# Altium PCB Power Converter 5V as TO-3 replacement.PcbDoc
Units mm, origin at the board's own origin, x right, y up, seen from the top; angles counter-clockwise.
Board outline 25.92 x 38.93 mm, 2 copper layers (Top Layer, Bottom Layer), stack 0.969 mm thick; 19 components, 10 nets, 41 pads, 35 vias.
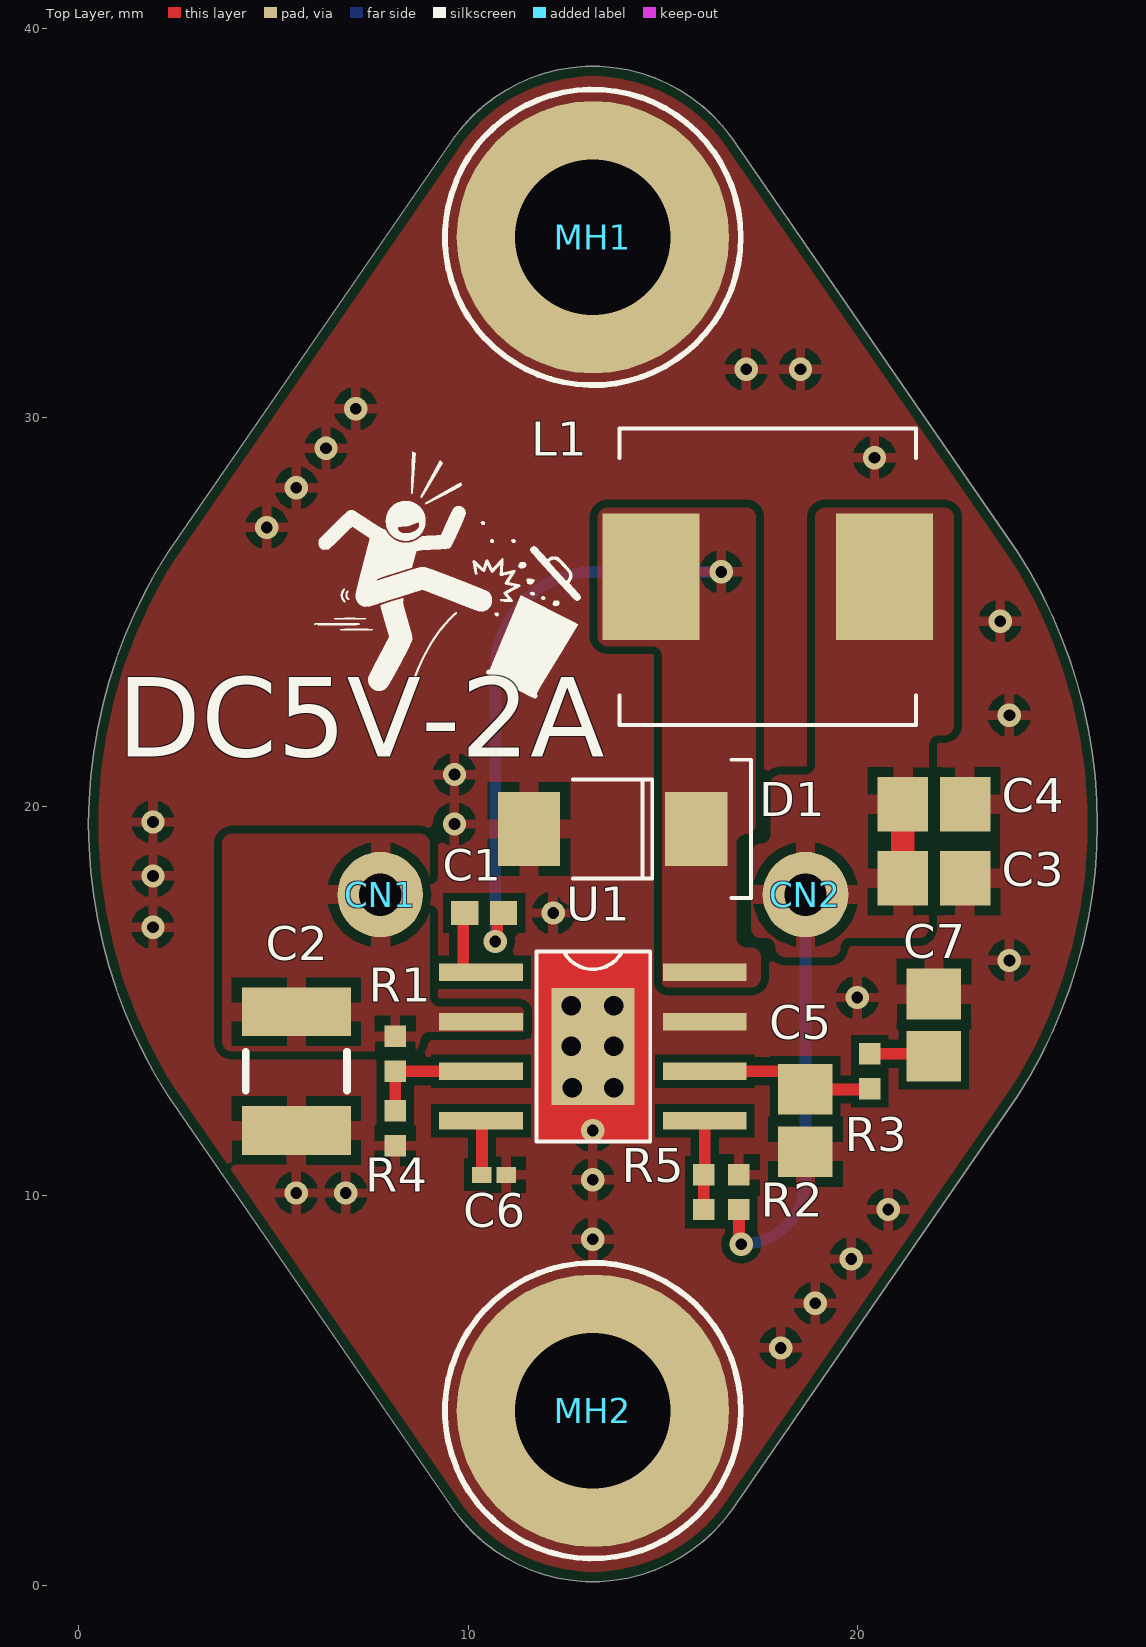
[diagram p0: Top Layer view]
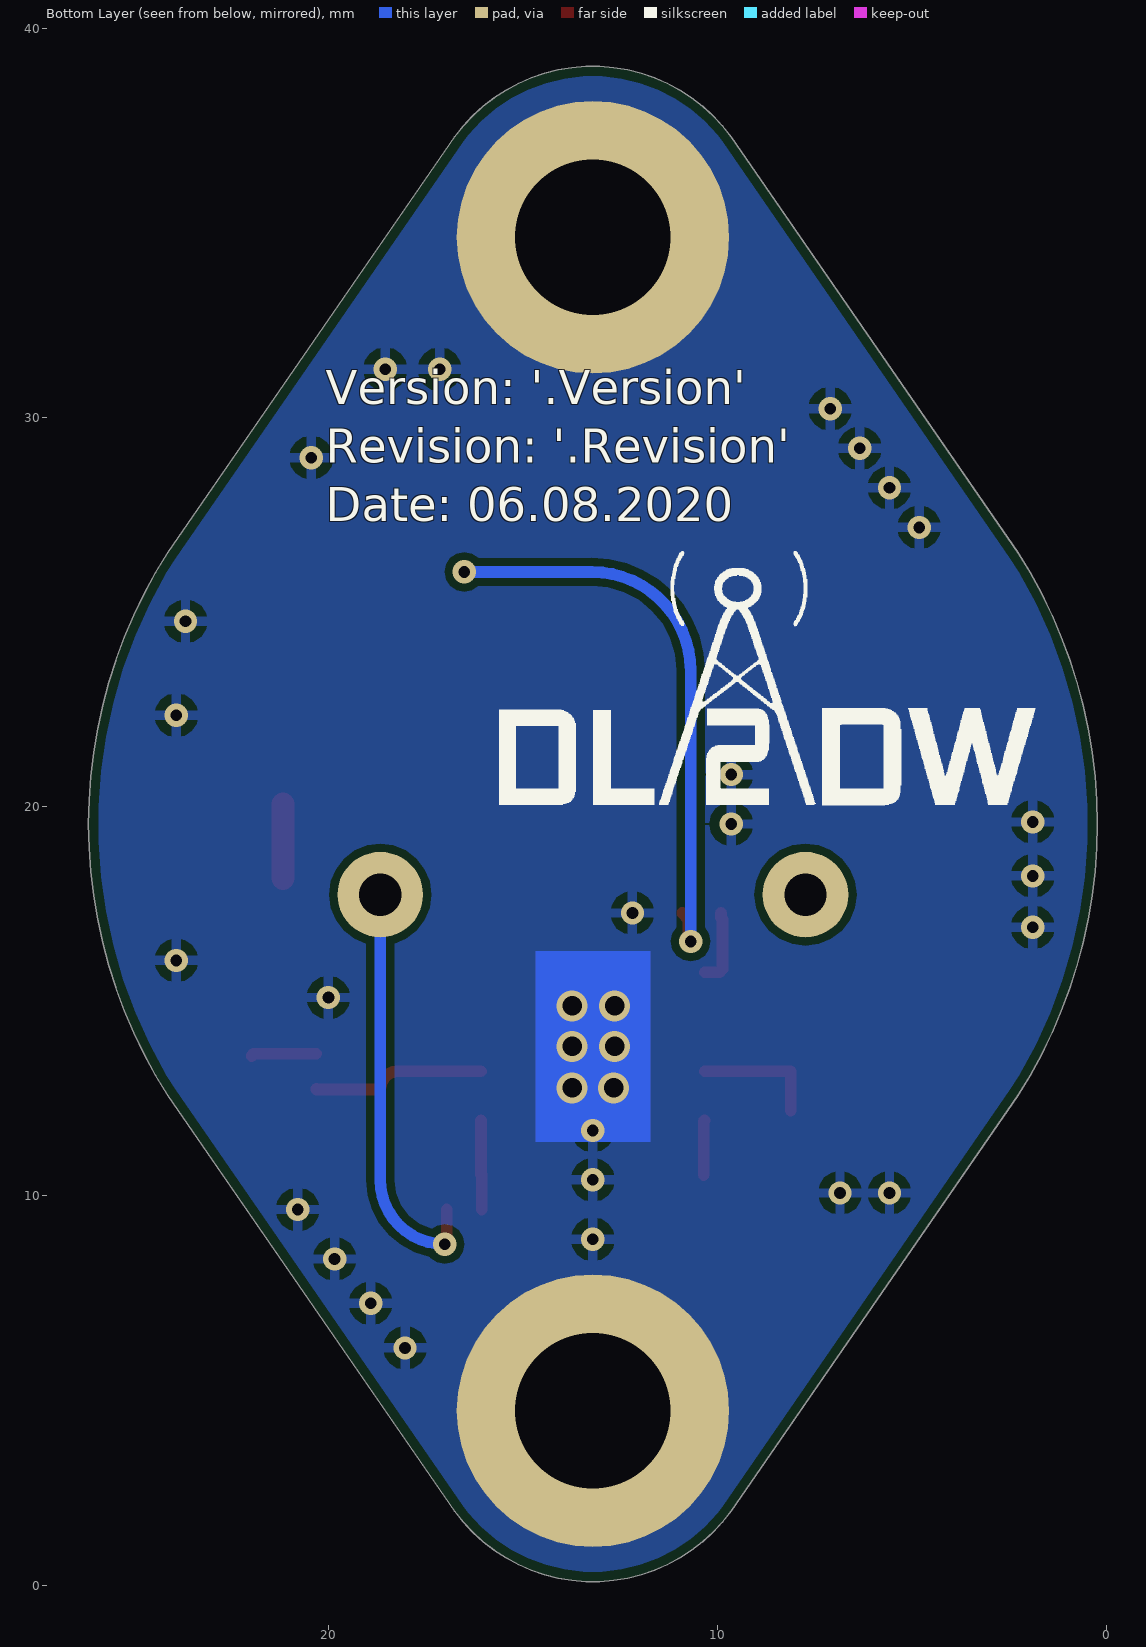
[diagram p1: Bottom Layer view, seen from below]
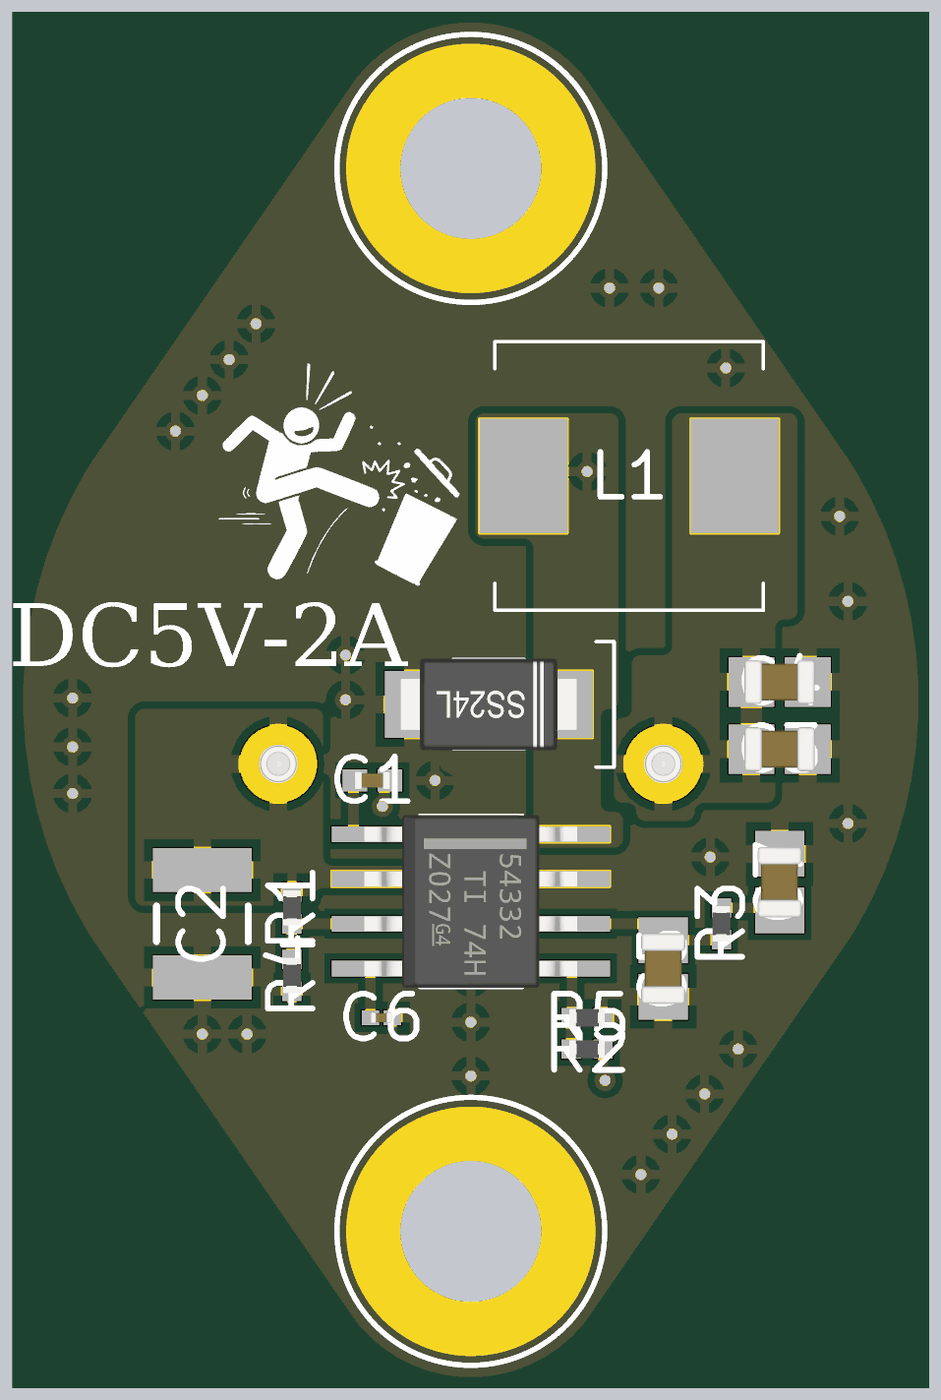
[diagram p2: 3D render of the assembled board from above, using the file's embedded part models]

## Layer stack, top to bottom
Top Solder: solder mask 0.0254, SM-001, Dk 4
Top Layer: signal copper 0.035
Dielectric 1: core 0.8986, Core-043, Dk 4.3
Bottom Layer: signal copper 0.035
Bottom Solder: solder mask 0.0254, SM-001, Dk 4

## Board outline
2.29,12.576 cw(c13.208,19.558) 2.29,26.54 9.652,37.211 cw(c13.208,34.633) 16.764,37.211 24.126,26.54 cw(c13.208,19.558) 24.126,12.576 16.764,1.905 cw(c13.208,4.483) 9.652,1.905

## Design rules (kind name [scope] priority, off if disabled: settings)
BoardOutlineClearance [All] p1: gap=0.254 ignorepadtopadclearanceinfootprint=FALSE
Clearance [All] p1: gap=0.2 ignorepadtopadclearanceinfootprint=TRUE
ComponentClearance ComponentClearance_Sheet [HasFootprint('PCB Title Block DIN A4')] p1: gap=0 collisioncheckmode=3 verticalgap=0 showdistances=FALSE
ComponentClearance [All] p2: gap=0.254 collisioncheckmode=3 verticalgap=0.254 showdistances=FALSE
HoleSize [All] p1: absolutevalues=TRUE maxlimit=10 minlimit=0.025 maxpercent=80.000 minpercent=20.000
MinimumSolderMaskSliver [All] p1: minsoldermaskwidth=0.103
PolygonConnect [All] p1: connectstyle=Relief reliefconductorwidth=0.254 reliefentries=4 polygonreliefangle="90 Angle" airgapwidth=0.254
RoutingVias [All] p1: holewidth=0.4 width=0.7 viastyle="Through Hole" minholewidth=0.3 minwidth=0.6 maxholewidth=0.5 maxwidth=0.8
SilkToSilkClearance [All] p1: silktosilkclearance=0
SilkToSolderMaskClearance [IsPad] p1: minsilkscreentomaskgap=0.2 clearancetoexposedcopper=TRUE
SolderMaskExpansion [All] p1: expansion=0.038 istentingtop=FALSE
UnRoutedNet [All] p1: checkbadconnections=TRUE
Width [All] p1: maxlimit=0.6 minlimit=0.3 preferedwidth=0.4
24 further rules are at their usual default settings.

## Components (designator, comment, footprint, x,y, rotation, side; value= is the part's Value field where it differs from the comment)
C1 "100nF / 10V" "CAP CER SMD 0402 100nF 10V Murata GRM155R71A104KA01D" 10.414,17.272 r0 top
C2 "22µF / 16V" "CAP CER SMD 1210 22µF 16V Murata GRM32ER61C226ME20L" 5.588,13.208 r90 top
C3 "22µF / 10V" "CAP CER SMD 0805 22µF 10V Murata GRM21BR61A226ME44L" 21.971,18.161 r180 top
C4 "22µF / 10V" "CAP CER SMD 0805 22µF 10V Murata GRM21BR61A226ME44L" 21.971,20.066 r180 top
C5 "10pF / 50V" "CAP CER SMD 0805 10pF 50V Samsung CL21C100JBANNNC" 18.669,11.938 r90 top
C6 "8,2nF / 10V" "CAP CER SMD 0201 8,2nF 10V Murata GRM033R71A822KA01D" 10.668,10.541 r180 top
C7 "1.2nF / 50V" "CAP CER SMD 0805 1.2nF 50V Samsung CL21C122JBFNNNE" 21.971,14.389 r270 top
CN1 "Input 9V" "Printed Circuit Pin 1.02mm 3125-2-00-80-00-00-08-0" 7.745,17.743 r90 top locked
CN2 "+5V" "Printed Circuit Pin 1.02mm 3125-2-00-80-00-00-08-0" 18.671,17.743 r90 top locked
D1 "SS24FL" SS24FL 13.716,19.431 r180 top
L1 "DR73-4R7-R" "Inductor SMD 4.7µH Eatont DR73-4R7-R" 17.701,25.908 r0 top
MH1 "Mounting Hole 4.0mm with Pad" "Mounting Hole 4mm with Pad" 13.208,34.633 r90 top
MH2 "Mounting Hole 4.0mm with Pad" "Mounting Hole 4mm with Pad" 13.208,4.483 r90 top
R1 "169k" "RES SMD 0402 169k Vishay CRCW0402169KFKED" 8.128,13.658 r90 top
R2 "10k2" "RES SMD 0402 10k2 Vishay CRCW040210K2FKED" 16.51,9.652 r0 top
R3 "33k2" "RES SMD 0402 33k2 Vishay CRCW040233K2FKED" 20.32,13.208 r270 top
R4 "40k2" "RES SMD 0402 40k2 Vishay CRCW040240K2FKED" 8.128,11.742 r90 top
R5 "1k96" "RES SMD 0402 1k96 Vishay CRCW04021K96FKED" 16.51,10.541 r180 top
U1 "TPS54332DDAR" "DC-DC Converter (Buck) TPS54332DDAR SO-Power Pad" 13.208,13.843 r270 top

## Footprints (in the part's own frame and the unit in brackets; to place one, negate y for a bottom-side part, rotate by r counter-clockwise, add the part's x,y. Pads: shape width x height; smd on the part's side, far side on the other; paste and mask are expansions set on the pad)
"CAP CER SMD 0201 8,2nF 10V Murata GRM033R71A822KA01D" [mm] "Chip Capacitor, 2-Leads, Body 0,60x0,30mm, IPC Medium Density"
  rect 0.5x0.42 smd: 1(-0.31,0) 2(0.31,0)
  body extent -0.3,-0.15 0.3,0.15, height 0.3
"CAP CER SMD 0402 100nF 10V Murata GRM155R71A104KA01D" [mm] "Chip Capacitor, 2-Leads, Body 1,00x0,50mm, IPC Medium Density"
  rect 0.7x0.62 smd: 1(-0.5,0) 2(0.5,0)
  body extent -0.5,-0.25 0.5,0.25, height 0.5
"CAP CER SMD 0805 1.2nF 50V Samsung CL21C122JBFNNNE" [mm] "Chip Capacitor, 2-Leads, Body 2,00x1,25mm, IPC Medium Density"
  rect 1.3x1.4 smd: 1(-0.8,0) 2(0.8,0)
  body extent -1,-0.62 1,0.62, height 1.25
"CAP CER SMD 0805 10pF 50V Samsung CL21C100JBANNNC" [mm] "Chip Capacitor, 2-Leads, Body 2,00x1,25mm, IPC Medium Density"
  rect 1.3x1.4 smd: 1(-0.8,0) 2(0.8,0)
  body extent -1,-0.62 1,0.62, height 1.25
"CAP CER SMD 0805 22µF 10V Murata GRM21BR61A226ME44L" [mm] "Chip Capacitor, 2-Leads, Body 2,00x1,25mm, IPC Medium Density"
  rect 1.3x1.4 smd: 1(-0.8,0) 2(0.8,0)
  body extent -1,-0.63 1,0.62, height 1.25
"CAP CER SMD 1210 22µF 16V Murata GRM32ER61C226ME20L" [mm] "Chip Capacitor, 2-Leads, Body 3,20x2,50mm, IPC Medium Density"
  rect 1.25x2.8 smd: 1(-1.525,0) 2(1.525,0)
  silkscreen extent -0.5,-1.3 0.5,1.3, body extent -1.6,-1.25 1.6,1.25, height 2.5
"DC-DC Converter (Buck) TPS54332DDAR SO-Power Pad" [mm]
  rect 0.45x2.15 smd: 1(-1.905,-2.875) 2(-0.635,-2.875) 3(0.635,-2.875) 4(1.905,-2.875) 5(1.905,2.875) 6(0.635,2.875) 7(-0.635,2.875) 8(-1.905,2.875)
  rect 3x2.13 smd: 9(0,0)
  Top Layer region: -2.445,1.47 2.445,1.47 2.445,-1.47 -2.445,-1.47
  Bottom Layer region: -2.445,1.47 2.445,1.47 2.445,-1.47 -2.445,-1.47
  silkscreen extent -2.44,-1.45 2.44,1.47, body extent -2.45,-3.02 2.45,3.02, height 1.7
"Inductor SMD 4.7µH Eatont DR73-4R7-R" [mm] "4,7µH Geschirmt Drahtgewickelt Induktor 3,09A 29,7mOhm Nicht standardmäßig"
  rect 2.5x3.25 smd: 1(-3,0) 2(3,0)
  silkscreen extent -3.81,-3.81 3.81,3.81, body extent -3.8,-3.8 3.8,3.8, height 3.56
"Mounting Hole 4mm with Pad" [mm]
  round 7 hole 4: 1(0,0)
  silkscreen extent -3.8,-3.8 3.8,3.8
"Printed Circuit Pin 1.02mm 3125-2-00-80-00-00-08-0" [mm]
  round 2.2 hole 1.09: 1(0,0)
  body extent -0.9,-0.9 0.9,0.9, height 0.48
"RES SMD 0402 1k96 Vishay CRCW04021K96FKED" [mm] "Chip Resistor, 2-Leads, Body 1,00x0,50mm, IPC Medium Density"
  rect 0.55x0.55 smd: 1(-0.45,0) 2(0.45,0)
  body extent -0.5,-0.25 0.5,0.25, height 0.35
"RES SMD 0402 10k2 Vishay CRCW040210K2FKED" [mm] "Chip Resistor, 2-Leads, Body 1,00x0,50mm, IPC Medium Density"
  rect 0.55x0.55 smd: 1(-0.45,0) 2(0.45,0)
  body extent -0.5,-0.25 0.5,0.25, height 0.35
"RES SMD 0402 33k2 Vishay CRCW040233K2FKED" [mm] "Chip Resistor, 2-Leads, Body 1,00x0,50mm, IPC Medium Density"
  rect 0.55x0.55 smd: 1(-0.45,0) 2(0.45,0)
  body extent -0.5,-0.25 0.5,0.25, height 0.35
"RES SMD 0402 40k2 Vishay CRCW040240K2FKED" [mm] "Chip Resistor, 2-Leads, Body 1,00x0,50mm, IPC Medium Density"
  rect 0.55x0.55 smd: 1(-0.45,0) 2(0.45,0)
  body extent -0.5,-0.25 0.5,0.25, height 0.35
"RES SMD 0402 169k Vishay CRCW0402169KFKED" [mm] "Chip Resistor, 2-Leads, Body 1,00x0,50mm, IPC Medium Density"
  rect 0.55x0.55 smd: 1(-0.45,0) 2(0.45,0)
  body extent -0.5,-0.25 0.5,0.25, height 0.35
SS24FL [mm] "Schottky Dioden & Gleichrichter 40V, 2A SCHOTTKY"
  rect 1.6x1.9 smd: 1(-2.15,0) 2(2.15,0)
  silkscreen extent -3.56,-1.78 1.02,1.78, body extent -2.5,-1.3 2.5,1.3, height 1.15

## Part data
C1: library part CMP-Capacitors-Ceramic_Capacitors-00034-2, "CAP CER 0.1UF 10V X7R 0402", Capacitance=100nF, Case Code (Imperial)=0402, Case Code (Metric)=1005, Dielectric=X7R, Max Operating Temperature=125°C, Min Operating Temperature=-55°C, Package Quantity=1, Tolerance=10%, Voltage=10V, Case/Package=0402, Depth=0.5mm, Dissipation Factor=0.035%, Height=0.5mm, Lead Free="Lead Free", Length=1mm, Mount="Surface Mount", Number of Pins=2, Packaging="Tape and Reel", Radiation Hardening=No, REACH SVHC="No SVHC", Termination=SMD/SMT, Thickness=0.022inch, Voltage Rating=10V, Voltage Rating (DC)=10V, Width=0.02inch
C2: library part CMP-Capacitors-Ceramic_Capacitors-00036-1, "Ceramic capacitor SMD 1210 22 µF 16 V 20 %", Capacitance=22uF, Case Code (Imperial)=1210, Case Code (Metric)=3225, Dielectric=X5R, Max Operating Temperature=85°C, Min Operating Temperature=-55°C, Package Quantity=1000, Tolerance=20%, Voltage=16V, Case/Package=1210, Depth=2.5mm, Height=2.5mm, Lead Free="Lead Free", Length=3.2mm, Material=Ceramic, Mount="Surface Mount", Packaging="Tape and Reel", Radiation Hardening=No, Termination=SMD/SMT, Thickness=0.106inch, Voltage Rating=16V, Voltage Rating (DC)=16V, Width=0.098inch
C3 C4: library part CMP-Capacitors-Ceramic_Capacitors-00038-1, "Multilayer Ceramic Capacitors MLCC - SMD/SMT 0805 22uF 10volts X5R 20%", Capacitance=22uF, Case Code (Imperial)=0805, Case Code (Metric)=2012, Dielectric=X5R, Dielectric Material=Ceramic, Max Operating Temperature=85°C, Min Operating Temperature=-55°C, Package Quantity=3000, Tolerance=20%, Voltage=10V, Case/Package=0805, Composition=Ceramic, Depth=1.25mm, Dissipation Factor=0.035%, Height=1.25mm, Lead Free="Lead Free", Length=2mm, Mount="Surface Mount", Packaging="Tape and Reel", Termination=SMD/SMT, Thickness=0.057inch, Voltage Rating=10V, Voltage Rating (DC)=10V, Weight=0.000335oz, Width=1.25mm
C5: library part CMP-Capacitors-Ceramic_Capacitors-00031-1, "Cap Ceramic 10pF 50VDC C0G 5% SMD 0805 Paper T/R", Capacitance=10pF, Case Code (Imperial)=0805, Case Code (Metric)=2012, Dielectric=C0G, Max Operating Temperature=125°C, Min Operating Temperature=-55°C, Package Quantity=1, Tolerance=5%, Voltage Rating=50V, Case/Package=0805, Contact Plating=Tin, Depth=1.25mm, Height=0.65mm, Length=2mm, Mount="Surface Mount", Packaging="Tape and Reel", Radiation Hardening=No, Thickness=0.03inch, Width=0.049inch
C6: library part CMP-Capacitors-Ceramic_Capacitors-00033-1, "Multilayer Ceramic Capacitors MLCC - SMD/SMT 0.0082uF 10volts 10%", Capacitance=8.2nF, Case Code (Imperial)=0201, Case Code (Metric)=0603, Dielectric=X7R, Max Operating Temperature=125°C, Min Operating Temperature=-55°C, Package Quantity=15000, Tolerance=10%, Voltage Rating=10V, Case/Package=0201, Depth=0.3mm, Height=0.3mm, Length=0.6mm, Mount="Surface Mount", Packaging="Tape and Reel", Radiation Hardening=No, Termination=SMD/SMT, Thickness=0.013inch, Voltage Rating (DC)=10V, Width=0.012inch
C7: library part CMP-Capacitors-Ceramic_Capacitors-00037-1, "Ceramic capacitor SMD-0805 1.2nF /50V NP0# J +-5% SAMSUNG , RoHS", Capacitance=1.2nF, Case Code (Imperial)=0805, Case Code (Metric)=2012, Max Operating Temperature=125°C, Min Operating Temperature=-55°C, Package Quantity=1, Tolerance=5%, Voltage Rating=50V, Case/Package=0805, Lead Free="Lead Free", Length=0.079inch, Mount="Surface Mount", Packaging="Cut Tape", Thickness=0.053inch, Voltage Rating (DC)=50V, Width=0.049inch
CN1 CN2: library part CMP-Mechanicals-00020-1, "CONN PC PIN CIRC 0.040DIA TIN", Package Quantity=500, Board Thickness=0.062inch, Contact Material=Brass, Contact Plating=Tin, Flange Diameter=0.071inch, Gender=Male, Hole Diameter=1.09mm, Insulation=Non-Insulated, Length=0.402inch, Material=Brass, Mount="Through Hole", Mounting Hole Diameter=0.043inch, Outside Diameter=1.8mm, Packaging=Bulk, Plating=Tin, Termination="PC Pin"
D1: library part CMP-Diodes-00012-3, "40V, 2A SCHOTTKY IN SOD123F", Average Rectified Current=2A, Case/Package=SOD, Max Forward Surge Current (Ifsm)=50A, Max Repetitive Reverse Voltage (Vrrm)=40V, Element Configuration=Single, Max Reverse Voltage (DC)=40V, Mount="Surface Mount", Number of Pins=2, Packaging="Tape and Reel", Reverse Recovery Time=9.495ns, Weight=0.0276g
L1: library part CMP-Inductors-00014-2, "Ind Power Shielded Wirewound 4.7uH 20% 100KHz Ferrite 3.09A T/R", Case/Package=Nonstandard, Current Rating=3.09A, DC Resistance (DCR)=29.7mR, Inductance=4.7uH, Inductance Tolerance=20%, Max Operating Temperature=125°C, Min Operating Temperature=-40°C, Package Quantity=1350, Saturation Current=3.78A, Self Resonant Frequency=100kHz, Composition=Wirewound, Core Material=Ferrite, Depth=7.6mm, Height=3.55mm, Height - Seated (Max)=0.139inch, Lead Free="Lead Free", Length=7.6mm, Max DC Current=3.09A, Military Standard=Not, Mount="Surface Mount", Number of Pins=2, Packaging="Tape and Reel", Radiation Hardening=No, REACH SVHC="No SVHC", RMS Current (Irms)=3.09A, Shielding=Shielded, Termination=SMD/SMT, Test Frequency=100kHz, Tolerance=20%, Weight=0.032oz, Width=6mm
MH1 MH2: library part CMP-Mechanicals-00019-2
R1: library part CMP-Resistors-00008-1, "VISHAY - CRCW0402169KFKED - RES, THICK FILM, 169K, 1%, 0.063W, 0402, REEL", Case Code (Imperial)=0402, Case Code (Metric)=1005, Max Operating Temperature=155°C, Max Power Dissipation=63mW, Min Operating Temperature=-55°C, Package Quantity=10, Resistance=169kR, Temperature Coefficient=100ppm/°C, Tolerance=1%, Voltage Rating=50V, Case/Package=0402, Composition="Thick Film", Contact Plating=Tin, Depth=0.5mm, Features="Automotive AEC-Q200", Height=0.35mm, Lead Free="Lead Free", Length=1mm, Military Standard=Not, Mount="Surface Mount", Number of Pins=2, Number of Terminations=2, Packaging="Tape and Reel", Power Rating=63mW, Radiation Hardening=No, REACH SVHC=Unknown, Termination=SMD/SMT, Voltage Rating (DC)=50V, Weight=2.3E-05oz, Width=0.02inch
R2: library part CMP-Resistors-00024-1, "VISHAY         CRCW040210K2FKED.            Surface Mount Chip Resistor, Thick Film, AEC-Q200 CRCW Series, 10.2 kohm, 63 mW,  1%, 50 V", Case Code (Imperial)=0402, Case Code (Metric)=1005, Max Operating Temperature=155°C, Max Power Dissipation=63mW, Min Operating Temperature=-55°C, Package Quantity=10, Resistance=10.2kR, Temperature Coefficient=100ppm/°C, Tolerance=1%, Voltage Rating=50V, Case/Package=0402, Composition="Thick Film", Contact Plating=Tin, Depth=0.5mm, Features="Automotive AEC-Q200", Height=0.35mm, Length=1mm, Military Standard=Not, Mount="Surface Mount", Number of Pins=2, Number of Terminations=2, Packaging="Tape and Reel", Power Rating=63mW, Radiation Hardening=No, REACH SVHC=Unknown, Termination=SMD/SMT, Weight=2.3E-05oz, Width=0.5mm
R3: library part CMP-Resistors-00037-1, "Res Thick Film 0402 33.2K Ohm 1% 1/16W 100ppm/C Molded SMD Paper T/R", Case Code (Imperial)=0402, Case Code (Metric)=1005, Max Operating Temperature=155°C, Max Power Dissipation=63mW, Min Operating Temperature=-55°C, Package Quantity=10, Resistance=33.2kR, Temperature Coefficient=100ppm/°C, Tolerance=1%, Voltage Rating=50V, Case/Package=0402, Composition="Thick Film", Contact Plating=Tin, Depth=0.5mm, Features="Automotive AEC-Q200", Height=0.35mm, Lead Free="Lead Free", Length=1mm, Military Standard=Not, Mount="Surface Mount", Number of Pins=2, Number of Terminations=2, Packaging="Tape and Reel", Power Rating=63mW, Radiation Hardening=No, REACH SVHC=Unknown, Termination=SMD/SMT, Voltage Rating (DC)=50V, Weight=2.3E-05oz, Width=0.5mm
R4: library part CMP-Resistors-00036-1, "Res Thick Film 0402 40.2K Ohm 1% 1/16W 100ppm/C Molded SMD SMD Paper T/R", Case Code (Imperial)=0402, Case Code (Metric)=1005, Max Operating Temperature=155°C, Max Power Dissipation=63mW, Min Operating Temperature=-55°C, Package Quantity=10, Resistance=40.2kR, Temperature Coefficient=100ppm/°C, Tolerance=1%, Voltage Rating=50V, Case/Package=0402, Composition="Thick Film", Contact Plating=Tin, Depth=0.5mm, Features="Automotive AEC-Q200", Height=0.35mm, Lead Free="Lead Free", Length=1mm, Military Standard=Not, Number of Terminations=2, Packaging="Tape and Reel", Power Rating=63mW, Radiation Hardening=No, REACH SVHC=Unknown, Termination=SMD/SMT, Voltage Rating (DC)=50V, Weight=2.3E-05oz, Width=0.5mm
R5: library part CMP-Resistors-00038-1, "VISHAY         CRCW04021K96FKED             RES, THICK FILM, 1K96, 1%, 0.063W, 0402", Case Code (Imperial)=0402, Case Code (Metric)=1005, Max Operating Temperature=155°C, Max Power Dissipation=63mW, Min Operating Temperature=-55°C, Package Quantity=10, Resistance=1.96kR, Temperature Coefficient=100ppm/°C, Tolerance=1%, Voltage Rating=50V, Case/Package=0402, Composition="Thick Film", Contact Plating=Tin, Depth=0.5mm, Features="Automotive AEC-Q200", Height=0.35mm, Length=1mm, Military Standard=Not, Number of Pins=2, Number of Terminations=2, Packaging="Tape and Reel", Power Rating=63mW, Radiation Hardening=No, REACH SVHC=Unknown, Termination=SMD/SMT, Weight=2.3E-05oz, Width=0.5mm
U1: library part CMP-ICs-Power_Supply-00013-5, "TEXAS INSTRUMENTS - TPS54332DDAR - DC/DC CONV, BUCK, 1MHZ, SOIC-8", Max Input Voltage=28V, Max Operating Temperature=150°C, Max Output Current=3.5A, Max Output Voltage=26.04V, Min Input Voltage=3.5V, Min Operating Temperature=-40°C, Min Output Voltage=800mV, Output Voltage=25V, Package Quantity=2500, Quiescent Current=82uA, Switching Frequency=1MHz, Contact Plating=Gold, Height=1.55mm, Lead Free="Contains Lead", Length=5mm, Min Supply Voltage=3.5V, Mount="Surface Mount", Number of Outputs=1, Number of Pins=8, Operating Supply Voltage=28V, Output Configuration=Positive, Output Current=3.5A, Output Type=Adjustable, Packaging="Tape and Reel", Radiation Hardening=No, REACH SVHC="No SVHC", Synchronous Rectifier=No, Weight=0.00249oz, Width=4mm

## Via types
v1: diameter 0.6, hole 0.3, Top Layer to Bottom Layer, tented both sides, 29 vias
v2: diameter 0.8, hole 0.5, Top Layer to Bottom Layer, tented both sides, 4 vias
v3: diameter 0.8, hole 0.5, Top Layer to Bottom Layer, tented bottom, 2 vias

## Nets (pads, with @x,y where several pads share a name; then routed paths per layer and width w, separated by ;. In a path a pad name is that pad's centre, name@x,y a point inside that pad or via, vN(x,y) a via of type N, cw(c..) or ccw(c..) an arc to the next point about the centre after c; other vN are vias at no path point)
5V-GND: C2.1 C3.1 C4.1 C5.1 C6.1 C7.1 D1.2 MH1.1 MH2.1 R4.1 R5.1 U1.7 U1.9
  other v1: 18.034,6.096 18.919,7.24 19.845,8.382 13.208,8.89 20.795,9.652 5.588,10.077 6.858,10.077 13.208,10.414 13.208,11.684 20.003,15.099 23.91,16.053 1.905,16.904 12.192,17.272 1.905,18.223 9.652,19.558 1.905,19.611 9.652,20.828 23.91,22.352 23.675,24.765 4.826,27.178 5.588,28.194 20.445,28.971 6.35,29.21 7.112,30.226 17.145,31.242 18.542,31.242
  other v2: 12.675,12.776 13.741,12.776 12.649,14.884 13.741,14.884
  other v3: 12.649,13.843 13.741,13.843
+5V: C3.2 C4.2 CN2.1 L1.2 R2.2 | length 12.8
  Top Layer w0.3: R2.2 16.96,8.821 ccw(c17.018,8.821) v1(17.018,8.763)
  Top Layer w0.6: C3.2 C4.2
  Bottom Layer w0.3: v1(17.018,8.763) ccw(c17.018,10.416) 18.671,10.416 CN2.1
Boot-5V: C1.1 U1.1 | length 2
  Top Layer w0.3: C1.1 9.914,17.149 9.877,17.112 9.877,15.823 9.952,15.748 U1.1
Comp-5V: C5.2 R3.2 U1.6 | length 4.5
  Top Layer w0.3: U1.6 18.199,13.208 cw(c18.199,12.738) C5.2 20.3,12.738 ccw(c20.3,12.758) R3.2
EN-5V: R1.1 R4.2 U1.3 | length 3.2
  Top Layer w0.3: R4.2 R1.1 U1.3
NetC7_2: C7.2 R3.1 | length 1.7
  Top Layer w0.3: R3.1 21.902,13.658 cw(c21.902,13.589) C7.2
PH-5V: C1.2 D1.1 L1.1 U1.8 | length 15.1
  Top Layer w0.3: v1(10.697,16.539) 10.754,16.596 10.754,17.112 C1.2
  Bottom Layer w0.3: v1@10.668,16.51 ccw(c10.668,16.539) v1(10.697,16.539) 10.697,23.495 cw(c13.237,23.495) 13.237,26.035 v1(16.51,26.035)
SS-5V: C6.2 U1.4 | length 1.4
  Top Layer w0.3: U1.4 cw(c10.333,11.913) 10.358,11.913 C6.2
Vin-5V: C2.2 CN1.1 R1.2 U1.2
VSense-5V: R2.1 R5.2 U1.5 | length 2.3
  Top Layer w0.3: R2.1 R5.2 ccw(c16.06,10.564) 16.083,10.564 U1.5

## Polygon pours and split planes (outlines as drawn)
5V-GND on Top Layer "Top Layer - 5V-GND" (solid, remove dead copper, pour order 12): 2.29,12.576 cw(c13.208,19.558) 2.29,26.54 9.652,37.211 cw(c13.208,34.633) 16.764,37.211 24.126,26.54 cw(c13.208,19.558) 24.126,12.576 16.764,1.905 cw(c13.208,4.483) 9.652,1.905
5V-GND on Top Layer "Top Layer - +12V" (solid, pour order 11): 14.732,14.986 17.653,14.986 ccw(c17.653,15.24) 17.907,15.24 17.907,15.494 cw(c18.161,15.494) 18.161,15.748 19.558,15.748 ccw(c19.558,16.002) 19.812,16.002 cw(c20.066,16.002) 20.066,16.256 21.844,16.256 ccw(c21.844,16.637) 22.225,16.637 22.225,21.336 cw(c22.479,21.336) 22.479,21.59 22.606,21.59 ccw(c22.606,21.844) 22.86,21.844 22.86,27.61 ccw(c22.403,27.61) 22.403,28.067 cw(c22.403,28.118) 22.352,28.118 22.352,28.702 cw(c22.733,28.702) 22.733,29.083 24.257,29.083 cw(c24.257,27.178) 26.162,27.178 26.162,14.986 cw(c25.654,14.986) 25.654,14.478 19.939,14.478 ccw(c19.939,14.224) 19.685,14.224 cw(c19.431,14.224) 19.431,13.97 14.605,13.97 cw(c14.605,14.097) 14.478,14.097 14.478,14.732 cw(c14.732,14.732)
5V-GND on Top Layer "Top Layer - +12V" (solid, pour order 10): 17.526,28.067 cw(c17.526,27.813) 17.78,27.813 17.78,21.463 ccw(c18.034,21.463) 18.034,21.209 18.288,21.209 ccw(c18.288,21.463) 18.542,21.463 18.542,27.813 cw(c18.796,27.813) 18.796,28.067 ccw(c18.796,28.194) 18.923,28.194 18.923,28.702 ccw(c18.796,28.702) 18.796,28.829 17.145,28.829 ccw(c17.145,28.448) 16.764,28.448 16.764,28.067
+5V on Top Layer "Top Layer - +12V" (solid, pour order 8): 18.923,27.432 cw(c19.177,27.432) 19.177,27.686 22.225,27.686 cw(c22.225,27.432) 22.479,27.432 22.479,22.098 cw(c22.225,22.098) 22.225,21.844 22.098,21.844 ccw(c22.098,21.59) 21.844,21.59 21.844,16.891 cw(c21.59,16.891) 21.59,16.637 19.812,16.637 ccw(c19.812,16.383) 19.558,16.383 cw(c19.304,16.383) 19.304,16.129 18.161,16.129 cw(c18.161,16.383) 17.907,16.383 ccw(c17.653,16.383) 17.653,16.637 17.526,16.637 cw(c17.526,16.891) 17.272,16.891 17.272,18.796 cw(c17.526,18.796) 17.526,19.05 ccw(c17.526,19.304) 17.78,19.304 17.78,20.574 cw(c18.034,20.574) 18.034,20.828 18.669,20.828 ccw(c18.669,21.082) 18.923,21.082
Vin-5V on Top Layer "Top Layer - +12V" (solid, pour order 5): 11.43,14.732 ccw(c11.303,14.732) 11.303,14.859 9.271,14.859 cw(c9.271,15.113) 9.017,15.113 9.017,19.05 ccw(c8.763,19.05) 8.763,19.304 3.937,19.304 ccw(c3.937,19.05) 3.683,19.05 3.683,13.97 ccw(c3.937,13.97) 3.937,13.716 8.509,13.716 ccw(c8.509,13.97) 8.763,13.97 cw(c9.017,13.97) 9.017,14.224 11.43,14.224
PH-5V on Top Layer "Top Layer - +12V" (solid, pour order 4): 14.986,23.876 ccw(c14.732,23.876) 14.732,24.13 13.589,24.13 cw(c13.589,24.384) 13.335,24.384 13.335,27.432 cw(c13.589,27.432) 13.589,27.686 17.145,27.686 cw(c17.145,27.432) 17.399,27.432 17.399,19.558 cw(c17.145,19.558) 17.145,19.304 ccw(c17.145,19.05) 16.891,19.05 16.891,16.637 ccw(c17.145,16.637) 17.145,16.383 17.272,16.383 cw(c17.272,16.129) 17.526,16.129 17.526,15.621 cw(c17.272,15.621) 17.272,15.367 15.113,15.367 cw(c15.113,15.494) 14.986,15.494
5V-GND on Top Layer "Top Layer - +12V" (solid, pour order 2): 14.678,16.288 11.738,16.288 11.738,17.976 cw(c11.796,17.976) 11.796,18.034 12.932,18.034 cw(c12.932,16.288)
5V-GND on Top Layer "Top Layer - +12V" (solid, pour order 1): 11.733,16.288 cw(c11.811,17.956) 11.811,18.034 12.932,18.034 cw(c12.932,16.288) 14.678,16.288
5V-GND on Top Layer "Top Layer - +12V" (solid, pour order 0): 11.733,16.288 ccw(c11.655,17.956) 11.655,18.034 9.779,18.034 cw(c9.779,18.288) 9.525,18.288 9.525,19.558 ccw(c9.271,19.558) 9.271,19.812 0.711,19.812 cw(c0.711,20.269) 0.254,20.269 0.254,36.576 cw(c2.794,36.576) 2.794,39.116 20.066,39.116 cw(c20.066,36.576) 22.606,36.576 22.606,28.321 cw(c22.352,28.321) 22.352,28.067 13.208,28.067 ccw(c13.208,27.813) 12.954,27.813 12.954,24.003 ccw(c13.208,24.003) 13.208,23.749 14.478,23.749 cw(c14.478,23.549) 14.678,23.549 14.678,16.288
5V-GND on Bottom Layer "Bottom Layer - 5V-GND" (solid, remove dead copper, pour order 13): 2.29,12.576 cw(c13.208,19.558) 2.29,26.54 9.652,37.211 cw(c13.208,34.633) 16.764,37.211 24.126,26.54 cw(c13.208,19.558) 24.126,12.576 16.764,1.905 cw(c13.208,4.483) 9.652,1.905

## Silkscreen, mask and mechanical layers (free items; w line width, h text height)
Top Overlay:
  drawing of 24 lines, arcs and shapes, not listed
  text "DC5V-2A" at 0.985,20.615 h3.5
Bottom Overlay:
  drawing of 8 lines, arcs and shapes, not listed
  text "Version: '.Version' / Revision: '.Revision' / Date: 06.08.2020" at 20.066,27.043 h1.5
Board:
  lines w0.1: 13.208,32.766 13.208,34.633 ; 2.29,12.576 cw(c13.208,19.558) 2.29,26.54 9.652,37.211 cw(c13.208,34.633) 16.764,37.211 24.126,26.54 cw(c13.208,19.558) 24.126,12.576 16.764,1.905 cw(c13.208,4.483) 9.652,1.905 2.29,12.576